# EAGLE board Zcontrol5X (EAGLE 5.10)
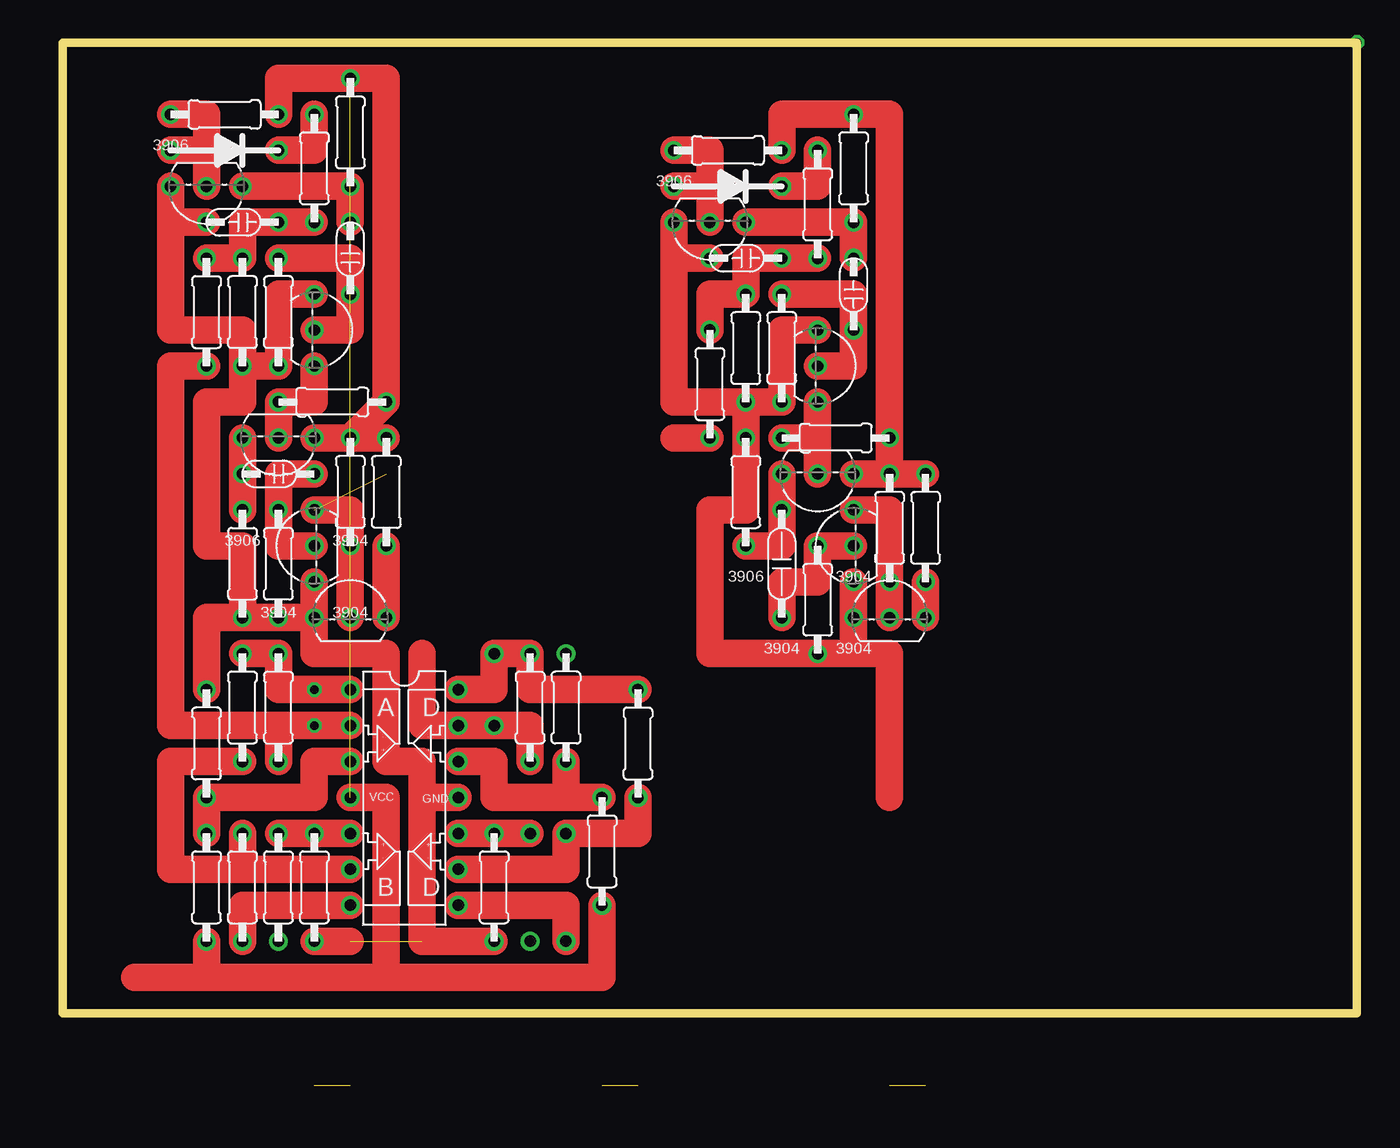
[diagram p0: board, top side]
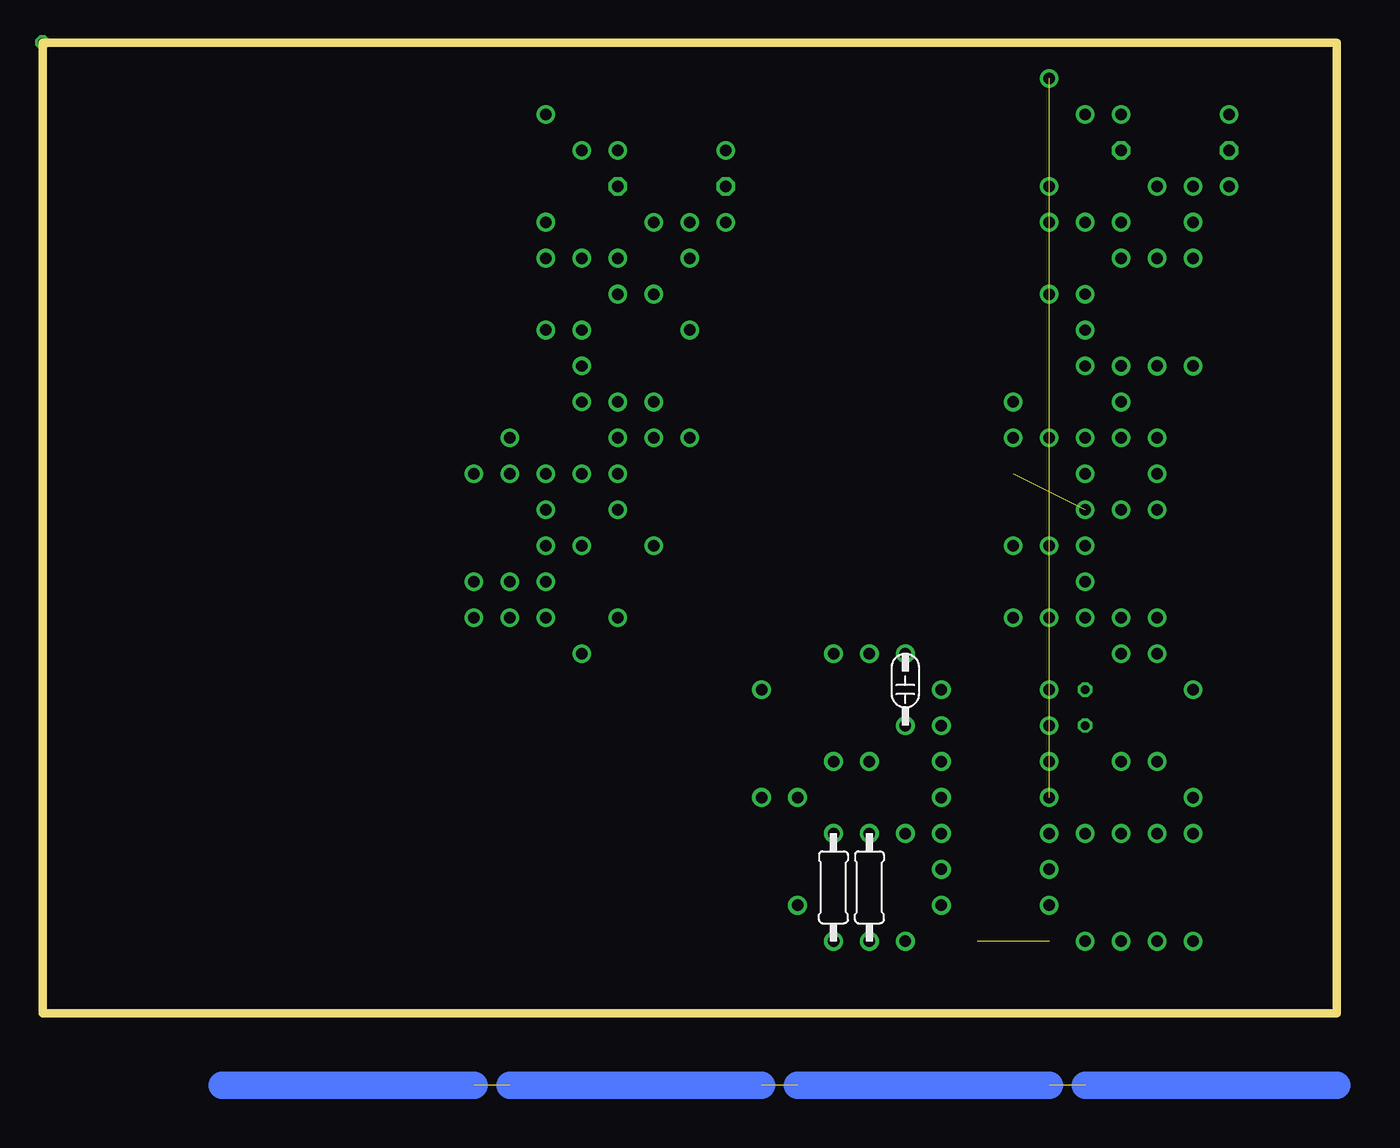
[diagram p1: board, bottom side, seen from below]

Size 91.44 x 68.58 mm. Coordinates in mm from the lower left corner, seen from the top.
Outline: 91.44,0 91.44,68.58 0,68.58 0,0 91.44,0
Copper layers (1*16): Top 0.035mm / dielectric 1.5mm / Bottom 0.035mm
Design rules "default": minimum track width 10mil, minimum drill 24mil, track to track 8mil, track to pad 8mil, pad to pad 8mil, via to via 8mil, smd to smd 8mil, copper to edge 40mil, drill to drill 8mil, minimum pad ring 10mil, minimum via ring 8mil, stop-mask expansion 4mil, vias tented up to drill 0mil, thermal gap 10mil

## Footprints (pad centres in the part's own frame; a part is rotated, then mirrored left to right if it is on the bottom)
SMALL-CAPACITOR = drill 0.813 round: IN1 0,0; IN2 5.08,0
TRANSISTOR = drill 0.8 round: P$1 0,0; P$2 2.54,0; P$3 -2.54,0
DIODE = drill 0.8 octagon: P$1 -3.81,0; P$2 3.81,0
RESISTOR = drill 0.813 round: IN1 -3.81,0; IN2 3.81,0
LM324-QUAD-OPAMP = drill 0.813 round: AMINUS -3.81,5.08; AOUT -3.81,7.62; APLUS -3.81,2.54; BMINUS -3.81,-5.08; BOUT -3.81,-7.62; BPLUS -3.81,-2.54; CMINUS 3.81,5.08; COUT 3.81,7.62; CPLUS 3.81,2.54; DMINUS 3.81,-5.08; DOUT 3.81,-7.62; DPLUS 3.81,-2.54; GND 3.81,0; VCC -3.81,0
CAPACITOR = drill 0.813 round: IN1 -2.54,0; IN2 5.08,0

## Placement (x,y rotation side)
E$1  [SMALL-CAPACITOR]  35.56,-36.83 270 top  (outside the outline)
E$2  50nF  [SMALL-CAPACITOR]  30.48,20.32 90 bottom
E$3  [TRANSISTOR]  10.16,58.42 180 top
E$4  [TRANSISTOR]  81.28,-39.37 90 top  (outside the outline)
E$5  [DIODE]  11.43,60.96 0 top
E$6  2k  [RESISTOR]  85.09,-31.75 0 top  (outside the outline)
E$7  4k  [RESISTOR]  11.43,63.5 180 top
E$8  10k  [RESISTOR]  87.63,-34.29 0 top  (outside the outline)
E$9  910  [RESISTOR]  17.78,59.69 270 top
E$10  2.2uF  [SMALL-CAPACITOR]  15.24,55.88 180 top
E$11  [LM324-QUAD-OPAMP]  24.13,15.24 0 top
E$12  [RESISTOR]  38.1,-38.1 270 top  (outside the outline)
E$13  [RESISTOR]  50.8,-38.1 270 top  (outside the outline)
E$14  [CAPACITOR]  35.56,-31.75 90 top  (outside the outline)
E$15  100k  [RESISTOR]  12.7,49.53 90 top
E$16  100k  [RESISTOR]  10.16,49.53 270 top
E$17  [CAPACITOR]  53.34,-31.75 90 top  (outside the outline)
E$19  200k  [RESISTOR]  15.24,21.59 270 top
E$20  2k  [RESISTOR]  10.16,19.05 90 top
E$21  5k  [RESISTOR]  10.16,8.89 270 top
E$22  2k  [RESISTOR]  12.7,21.59 270 top
E$23  2k  [RESISTOR]  12.7,8.89 270 top
E$24  [LM324-QUAD-OPAMP]  24.13,-36.83 180 top  (outside the outline)
E$25  [RESISTOR]  17.78,-38.1 270 top  (outside the outline)
E$26  [RESISTOR]  30.48,-38.1 270 top  (outside the outline)
E$27  [CAPACITOR]  15.24,-31.75 90 top  (outside the outline)
E$28  [CAPACITOR]  33.02,-31.75 90 top  (outside the outline)
E$29  2k  [RESISTOR]  17.78,8.89 270 top
E$30  20k  [RESISTOR]  15.24,8.89 270 top
E$31  10K  [RESISTOR]  20.32,62.23 270 top
E$32  500Pf  [SMALL-CAPACITOR]  20.32,50.8 90 top
E$33  100K  [RESISTOR]  15.24,49.53 90 top
E$34  [TRANSISTOR]  17.78,48.26 270 top
E$35  2k  [RESISTOR]  19.05,43.18 0 top
E$36  [TRANSISTOR]  15.24,40.64 180 top
E$37  22Pf  [SMALL-CAPACITOR]  17.78,38.1 180 top
E$39  2k  [RESISTOR]  69.85,-29.21 180 top  (outside the outline)
E$40  100k  [RESISTOR]  15.24,31.75 90 top
E$41  10k  [RESISTOR]  87.63,-39.37 0 top  (outside the outline)
E$42  10k  [RESISTOR]  87.63,-36.83 0 top  (outside the outline)
E$43  [TRANSISTOR]  17.78,33.02 90 top
E$44  2k  [RESISTOR]  20.32,36.83 90 top
E$45  [TRANSISTOR]  20.32,27.94 0 top
E$46  2k  [RESISTOR]  22.86,36.83 90 top
E$47  200k  [RESISTOR]  33.02,21.59 270 top
E$48  2k  [RESISTOR]  35.56,21.59 90 top
E$49  5k  [RESISTOR]  38.1,11.43 270 top
E$50  2k  [RESISTOR]  40.64,19.05 270 top
E$51  [CAPACITOR]  73.66,-34.29 270 top  (outside the outline)
E$52  2k  [RESISTOR]  35.56,8.89 270 bottom
E$53  2k  [RESISTOR]  30.48,8.89 270 top
E$54  20k  [RESISTOR]  33.02,8.89 270 bottom
E$55  [TRANSISTOR]  45.72,55.88 180 top
E$56  4k  [RESISTOR]  46.99,60.96 180 top
E$57  [DIODE]  46.99,58.42 0 top
E$58  910  [RESISTOR]  53.34,57.15 270 top
E$59  2.2uF  [SMALL-CAPACITOR]  50.8,53.34 180 top
E$60  100k  [RESISTOR]  48.26,46.99 90 top
E$61  100k  [RESISTOR]  45.72,44.45 270 top
E$62  10K  [RESISTOR]  55.88,59.69 270 top
E$63  500Pf  [SMALL-CAPACITOR]  55.88,48.26 90 top
E$64  100K  [RESISTOR]  50.8,46.99 90 top
E$65  [TRANSISTOR]  53.34,45.72 270 top
E$66  2k  [RESISTOR]  54.61,40.64 0 top
E$67  [TRANSISTOR]  53.34,38.1 180 top
E$68  2k  [RESISTOR]  48.26,36.83 270 top
E$69  22Pf  [CAPACITOR]  50.8,30.48 90 top
E$70  100k  [RESISTOR]  53.34,29.21 90 top
E$71  [TRANSISTOR]  55.88,33.02 90 top
E$72  2k  [RESISTOR]  58.42,34.29 90 top
E$73  [TRANSISTOR]  58.42,27.94 0 top
E$74  2k  [RESISTOR]  60.96,34.29 90 top
E$75  2k  [RESISTOR]  12.7,31.75 270 top

## Library data of the parts
E$1-E$17 E$19-E$37 E$39-E$75 = RussellLibrary

## Nets
GND1: E$3.P$2 E$10.IN2 E$11.GND E$15.IN1 E$20.IN2 E$29.IN2 E$33.IN1 E$34.P$3 E$40.IN1 E$43.P$3 E$45.P$3 E$53.IN2
GND2: E$55.P$2 E$59.IN2 E$60.IN1 E$64.IN1 E$65.P$3 E$68.IN1 E$70.IN1 E$71.P$3 E$73.P$3
S$1: E$3.P$1 E$5.P$1 E$7.IN2
S$2: E$5.P$2 E$9.IN1
S$4: E$9.IN2 E$10.IN1 E$15.IN2 E$16.IN1
S$5: E$11.AMINUS E$16.IN2 E$19.IN2
S$6: E$32.IN1 E$33.IN2 E$34.P$1
S$7: E$11.APLUS E$20.IN1 E$21.IN1
S$8: E$11.AOUT E$19.IN1 E$22.IN1
S$9: E$55.P$1 E$56.IN2 E$57.P$1
S$10: E$11.BMINUS E$22.IN2 E$23.IN1
S$11: E$11.BOUT E$23.IN2
S$12: E$11.BPLUS E$29.IN1 E$30.IN1
S$13: E$30.IN2
S$14: E$3.P$3 E$31.IN2 E$32.IN2
S$15: E$47.IN2
S$16: E$2.IN2 E$47.IN1 E$50.IN1
S$17: E$34.P$2 E$35.IN1 E$36.P$1
S$18: E$50.IN2 E$52.IN1
S$19: E$36.P$2 E$75.IN1
S$20: E$37.IN1 E$40.IN2 E$43.P$1
S$21: E$8.IN2 E$42.IN2
S$22: E$52.IN2
S$23: E$43.P$2 E$44.IN1 E$45.P$1
S$24: E$45.P$2 E$46.IN1
S$26: E$53.IN1 E$54.IN1
S$27: E$54.IN2
S$28: E$57.P$2 E$58.IN1
S$29: E$61.IN2
S$30: E$11.CPLUS E$48.IN1 E$49.IN1
S$31: E$55.P$3 E$62.IN2 E$63.IN2
S$32: E$63.IN1 E$64.IN2 E$65.P$1
S$33: E$65.P$2 E$66.IN1 E$67.P$1
S$34: E$69.IN1 E$70.IN2 E$71.P$1
S$35: E$71.P$2 E$72.IN1 E$73.P$1
S$36: E$73.P$2 E$74.IN1
S$37: E$67.P$2 E$68.IN2 E$69.IN2
S$38: E$58.IN2 E$59.IN1 E$60.IN2 E$61.IN1
S$39: E$7.IN1 E$11.VCC E$21.IN2 E$31.IN1 E$49.IN2
S$40: E$56.IN1 E$62.IN1
VCC1: E$35.IN2 E$36.P$3 E$44.IN2 E$46.IN2
VCC2: E$66.IN2 E$67.P$3 E$72.IN2 E$74.IN2

## Tracks (layer width: path | path; a pad name or v marks a point on that pad's centre or on a via)
GND1  (1 unrouted)
  Top 1.93: 7.62,55.88 E$3.P$2 | 7.62,55.88 7.62,48.26 12.7,48.26 E$15.IN1 | 7.62,55.88 E$10.IN2 | E$15.IN1 E$33.IN1 15.24,50.8 E$34.P$3 | E$15.IN1 12.7,43.18 10.16,43.18 10.16,33.02 12.7,33.02 12.7,27.94 | 12.7,27.94 10.16,27.94 E$20.IN2 | 12.7,27.94 E$40.IN1 E$45.P$3 | E$45.P$3 E$43.P$3 | 25.4,15.24 E$11.GND | 25.4,15.24 25.4,17.78 22.86,17.78 22.86,25.4 17.78,25.4 E$45.P$3 | E$53.IN2 25.4,5.08 25.4,15.24 | E$29.IN2 20.32,5.08
GND2
  Top 1.93: 43.18,53.34 E$55.P$2 | 43.18,53.34 43.18,43.18 E$64.IN1 | 43.18,53.34 E$59.IN2 | E$64.IN1 E$60.IN1 E$68.IN1 48.26,35.56 45.72,35.56 45.72,25.4 E$70.IN1 55.88,25.4 | E$71.P$3 E$73.P$3 55.88,25.4 | 55.88,25.4 58.42,25.4 58.42,15.24 | E$64.IN1 50.8,48.26 E$65.P$3
S$1
  Top 1.93: E$7.IN2 10.16,63.5 10.16,60.96 | E$3.P$1 10.16,60.96 | 10.16,60.96 E$5.P$1
S$2
  Top 1.93: E$5.P$2 17.78,60.96 E$9.IN1
S$3  (3 unrouted)
  Bottom 1.93: 0,-5.08 17.78,-5.08 | 20.32,-5.08 38.1,-5.08 | 40.64,-5.08 58.42,-5.08 | 60.96,-5.08 78.74,-5.08
S$4
  Top 1.93: E$9.IN2 E$10.IN1 12.7,55.88 E$15.IN2 E$16.IN1
S$5  (via drill 0.6)
  Top 1.93: E$16.IN2 7.62,45.72 7.62,20.32 15.24,20.32 | 15.24,20.32 v17.78,20.32 E$11.AMINUS | 15.24,20.32 E$19.IN2
S$6
  Top 1.93: E$33.IN2 20.32,53.34 E$32.IN1 20.32,48.26 E$34.P$1
S$7
  Top 1.93: E$11.APLUS 17.78,17.78 17.78,15.24 E$20.IN1 E$21.IN1
S$8  (via drill 0.6)
  Top 1.93: E$11.AOUT v17.78,22.86 15.24,22.86 E$19.IN1 E$22.IN1
S$9
  Top 1.93: E$56.IN2 45.72,60.96 45.72,58.42 | E$55.P$1 45.72,58.42 | 45.72,58.42 E$57.P$1
S$10
  Top 1.93: 12.7,10.16 E$11.BMINUS | 12.7,10.16 7.62,10.16 7.62,17.78 E$22.IN2 | 12.7,10.16 E$23.IN1
S$11
  Top 1.93: E$23.IN2 12.7,7.62 E$11.BOUT
S$12
  Top 1.93: E$11.BPLUS E$29.IN1 E$30.IN1
S$14
  Top 1.93: E$3.P$3 E$31.IN2 E$32.IN2
S$15
  Top 1.93: 25.4,25.4 25.4,20.32 33.02,20.32 E$47.IN2
S$16
  Top 1.93: 27.94,22.86 30.48,22.86 E$2.IN2 E$47.IN1 33.02,22.86 E$50.IN1
S$17
  Top 1.93: E$36.P$1 E$35.IN1 | E$35.IN1 17.78,43.18 | E$35.IN1 17.78,43.18 | 17.78,43.18 E$34.P$2
S$18
  Top 1.93: 27.94,10.16 35.56,10.16 E$52.IN1 40.64,12.7 E$50.IN2
S$19
  Top 1.93: E$75.IN1 E$36.P$2
S$20
  Top 1.93: E$43.P$1 15.24,33.02 E$40.IN2 15.24,38.1 E$37.IN1
S$21  (1 unrouted)
S$22
  Top 1.93: E$52.IN2 35.56,7.62 27.94,7.62
S$23  (1 unrouted)
  Top 1.93: E$45.P$1 E$44.IN1 20.32,35.56 E$43.P$2
S$24
  Top 1.93: E$45.P$2 E$46.IN1
S$25  (via drill 0.6)
  other vias: 91.44,68.58
S$26
  Top 1.93: 27.94,12.7 E$53.IN1 E$54.IN1
S$28
  Top 1.93: E$57.P$2 53.34,58.42 E$58.IN1
S$29
  Top 1.93: 43.18,40.64 E$61.IN2
S$30
  Top 1.93: 35.56,15.24 E$48.IN1 | 35.56,15.24 30.48,15.24 30.48,17.78 E$11.CPLUS | 35.56,15.24 E$49.IN1
S$31
  Top 1.93: E$55.P$3 E$62.IN2 E$63.IN2
S$32
  Top 1.93: E$64.IN2 55.88,50.8 E$63.IN1 55.88,45.72 E$65.P$1
S$33
  Top 1.93: E$67.P$1 53.34,40.64 | 53.34,40.64 E$66.IN1 | 53.34,40.64 E$65.P$2
S$34
  Top 1.93: E$71.P$1 E$70.IN2 53.34,30.48 50.8,30.48 E$69.IN1
S$35
  Top 1.93: E$73.P$1 E$72.IN1 58.42,35.56 E$71.P$2
S$36
  Top 1.93: E$73.P$2 E$74.IN1
S$37
  Top 1.93: E$68.IN2 50.8,33.02 E$69.IN2 E$67.P$2
S$38
  Top 1.93: E$58.IN2 E$59.IN1 48.26,53.34 E$60.IN2 45.72,50.8 E$61.IN1
S$39  (1 unrouted)
  Top 1.93: E$49.IN2 38.1,2.54 22.86,2.54 | E$11.VCC 22.86,15.24 22.86,2.54 | 5.08,2.54 10.16,2.54 | 10.16,2.54 22.86,2.54 | 10.16,2.54 E$21.IN2 | E$7.IN1 15.24,66.04 E$31.IN1
S$40
  Top 1.93: E$56.IN1 50.8,63.5 E$62.IN1
VCC1
  Top 1.93: E$44.IN2 E$35.IN2 22.86,66.04 15.24,66.04 | E$44.IN2 E$46.IN2 | E$36.P$3 E$44.IN2
VCC2
  Top 1.93: 50.8,63.5 58.42,63.5 E$66.IN2 E$72.IN2 | E$72.IN2 E$74.IN2 | E$67.P$3 E$72.IN2

## Text on the board
Unrouted: Ir PhotoTrans | GND | VCC | X
tPlace: 3906 | 3906 | 3906 | 3904 | 3906 | 3904 | 3904 | 3904 | 3904 | 3904 | 3904